# Altium PCB PCB.PcbDoc
Units mm, origin at the board's own origin, x right, y up, seen from the top; angles counter-clockwise.
Board outline 79.8 x 60 mm, 2 copper layers (Top Layer, Bottom Layer); 37 components, 34 nets, 177 pads, 36 vias.
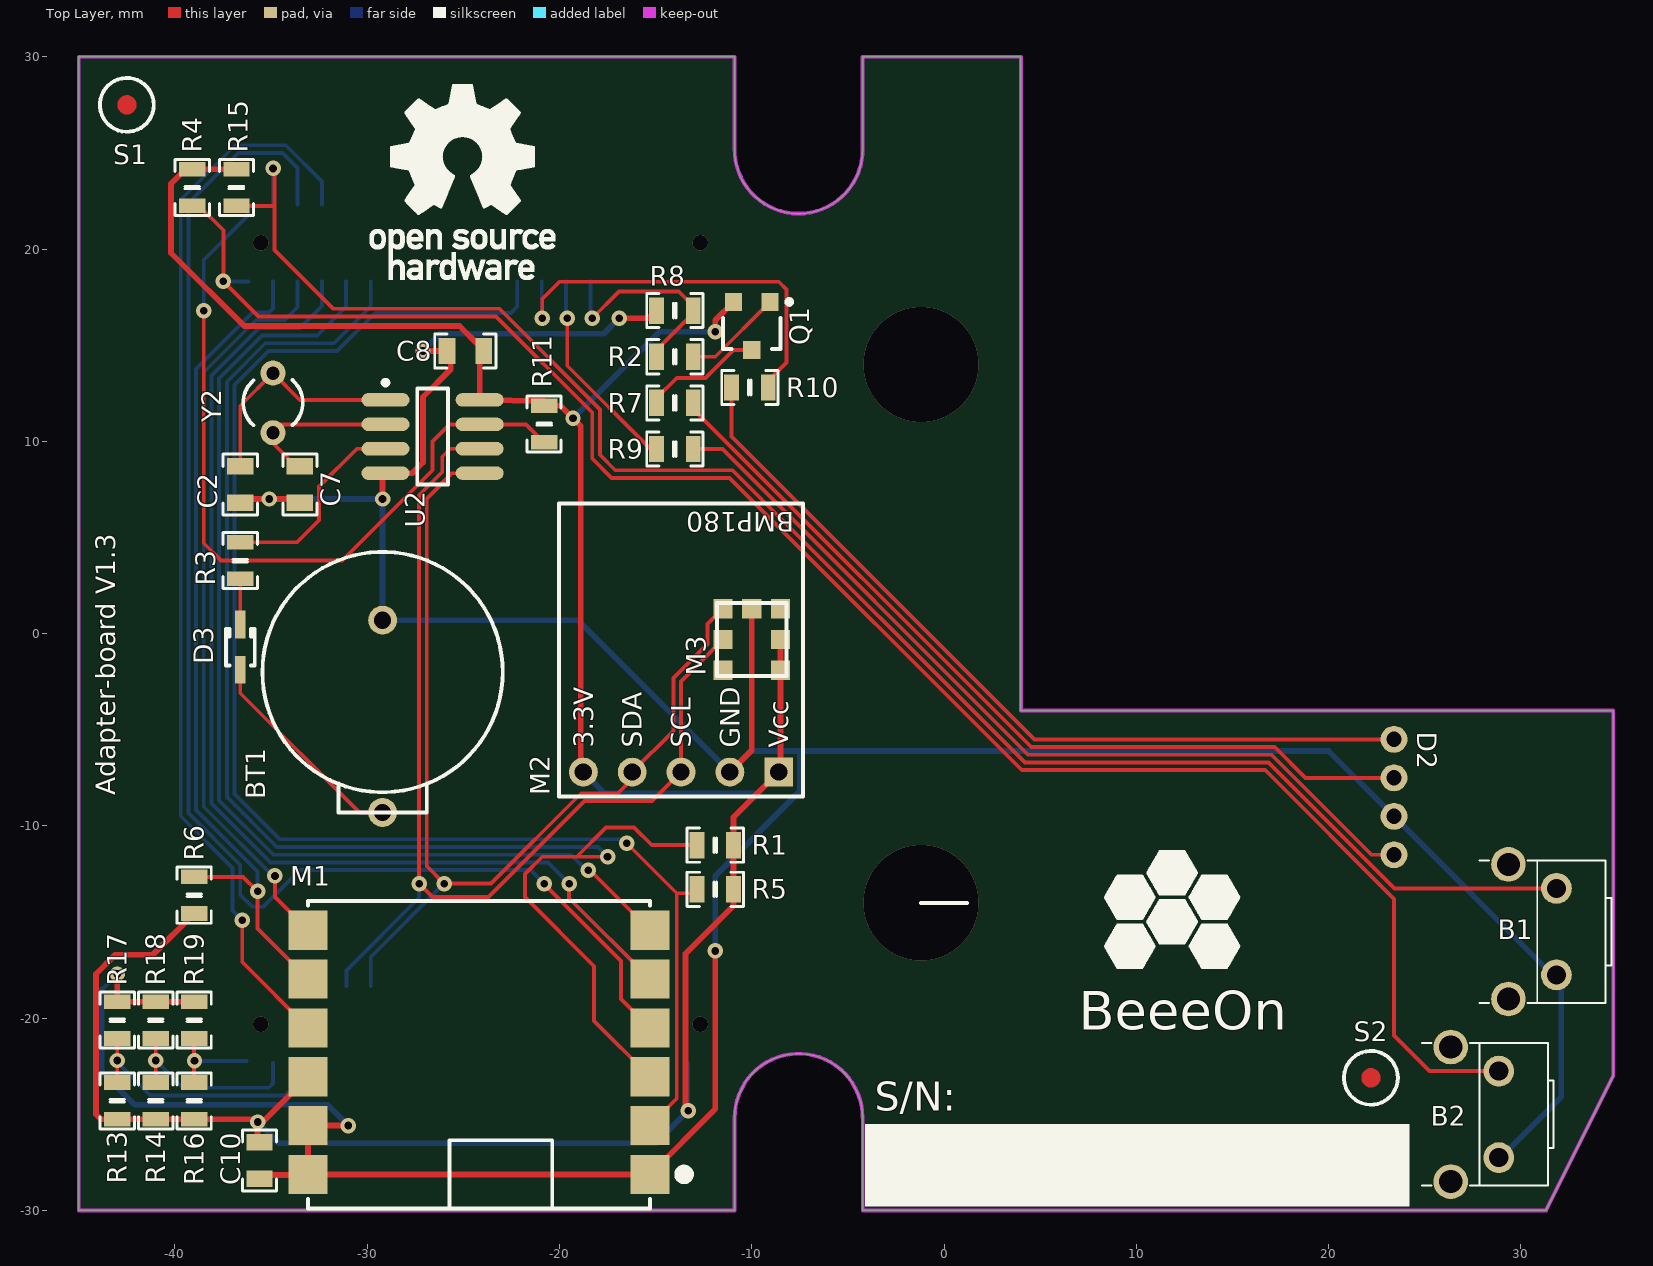
[diagram p0: Top Layer view]
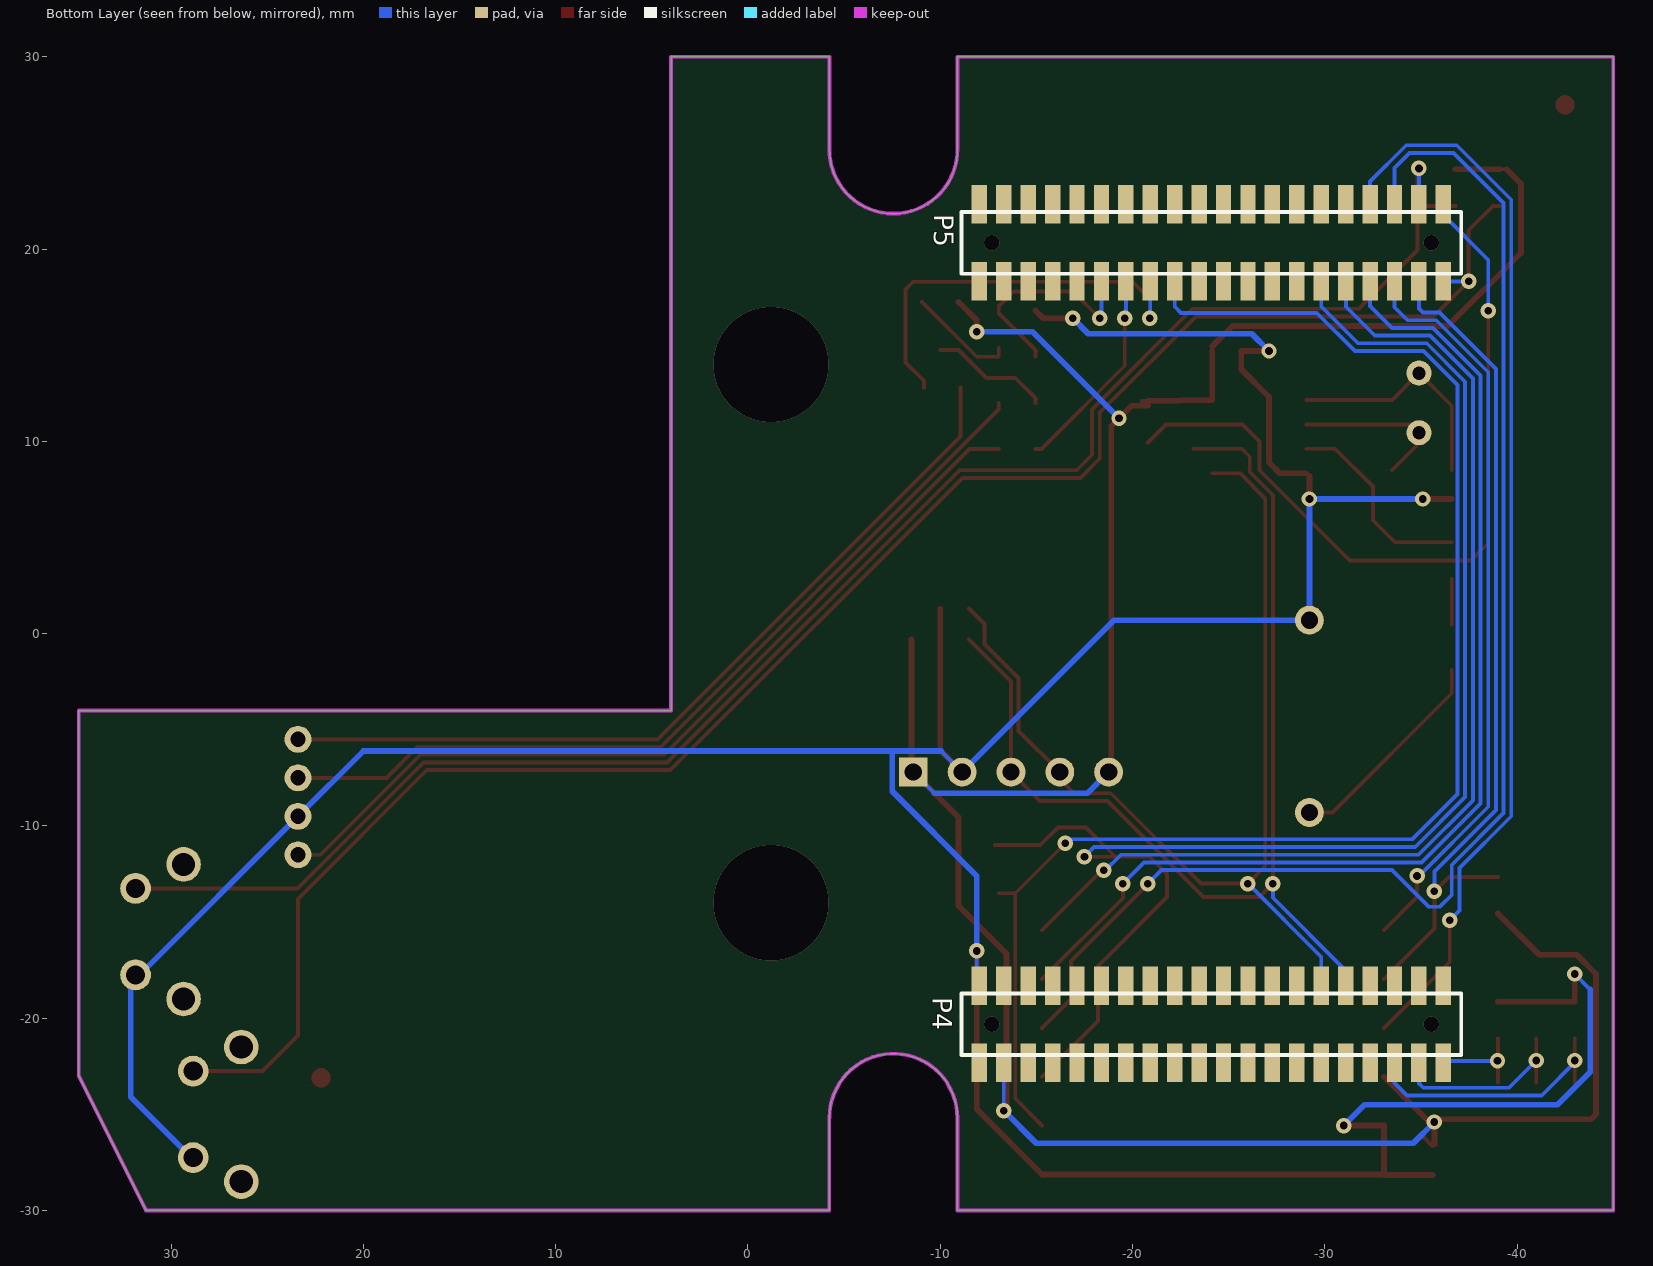
[diagram p1: Bottom Layer view, seen from below]

## Layer stack, top to bottom
Top Layer: signal copper 0.0356
Dielectric: dielectric 0.32, FR-4, Dk 4.8
Bottom Layer: signal copper 0.0356

## Board outline
-45,-30 -45,30 -10.892,30 -10.892,25.222 ccw(c-7.565,25.171) -4.237,25.222 -4.237,30 4,30 4,-4 34.8,-4 34.8,-23 31.3,-30 -4.225,-30 -4.225,-25.171 -4.237,-25.171 ccw(c-7.565,-25.171) -10.892,-25.197 -10.892,-30

## Design rules (kind name [scope] priority, off if disabled: settings)
Clearance Clearance_1 [OnLayer('Mechanical 1') vs inPolygon] p1: gap=0.5
Clearance [All] p2: gap=0.2
HoleSize [All] p1: absolutevalues=TRUE maxlimit=10 minlimit=0.025 maxpercent=80.000 minpercent=20.000
MinimumSolderMaskSliver [All] p1: minsoldermaskwidth=0.2
PolygonConnect [All] p1: connectstyle=Direct reliefconductorwidth=0.254 reliefentries=4 polygonreliefangle="90 Angle"
RoomDefinition connect [InComponentClass('connect')] p1 off: confinementstyle=ConfineIn formatcopy=TRUE lockcomponents=FALSE outline 60.8,-17.4 72.9,-17.4 72.9,-12.6 60.8,-12.6
RoutingVias [All] p1: holewidth=0.4 width=0.8 viastyle="Through Hole" minholewidth=0.4 minwidth=0.8 maxholewidth=10 maxwidth=10
SilkToSilkClearance [All] p1: silktosilkclearance=0.1
SilkscreenOverComponentPads [All] p1: minsilkscreentomaskgap=0.1
SolderMaskExpansion [All] p1: expansion=0.102
Width [All] p1: maxlimit=2.54 minlimit=0.2 preferedwidth=0.2
24 further rules are at their usual default settings.

## Components (designator, comment, footprint, x,y, rotation, side; value= is the part's Value field where it differs from the comment)
B1 "BUTTON" SPST_BTN 32,-15.5 r90 top locked
B2 "BUTTON" SPST_BTN 29,-25 r90 top
BT1 "Battery" BATT1220-HORIZONTAL -29.2,-2 r270 top
C2 "10pF" C0805 -36.6,7.75 r90 top
C7 "10pF" C0805 -33.5,7.75 r90 top
C8 "100nF" C0805 -24.9,14.7 r0 top
C10 "100nF" C0805 -35.6,-27.4 r90 top
D2 "LED MULTI3 CC" "LED_MULTI - AXIAL" 23.4,-8.5 r0 top locked
D3 "BAT46" SOD-323 -36.6,-0.7 r90 top
M1 "MRF89XAM8A" MRF89XAM8A -15.3,-13.9 r180 top locked
M2 "BMP180 Module" BMP180_MODULE -8.6,-7.2 r270 top locked
M3 "BMP180" BMP180 -10,-0.2 r90 top
P4 "GPIO-1" HDR127-20-F -24.1,-20.32 r180 bottom locked
P5 "GPIO-2" HDR127-20-F -24.1,20.32 r180 bottom locked
Q1 "PNP_BC857" SOT23 -10,16 r180 top
R1 "10k" R0805 -11.9,-11 r0 top
R2 "10k" R0805 -14,14.4 r0 top
R3 "1k" R0805 -36.6,3.8 r270 top
R4 "10k" R0805 -39.1,23.2 r90 top
R5 "10k" R0805 -11.9,-13.3 r0 top
R6 "10k" R0805 -39,-13.6 r270 top
R7 "150" R0805 -14,12 r0 top
R8 "10k" R0805 -14,16.8 r0 top
R9 "22" R0805 -14,9.6 r0 top
R10 "22" R0805 -10.1,12.8 r0 top
R11 "10k" R0805 -20.8,10.9 r270 top
R13 "10k" R0805 -43,-24.3 r90 top
R14 "10k" R0805 -41,-24.3 r90 top
R15 "10k" R0805 -36.8,23.2 r90 top
R16 "10k" R0805 -39,-24.3 r90 top
R17 "10k" R0805 -43,-20.1 r90 top
R18 "10k" R0805 -41,-20.1 r90 top
R19 "10k" R0805 -39,-20.1 r90 top
S1 "TARGET" TARGET -42.5,27.5 r0 top
S2 "TARGET" TARGET 22.2,-23.1 r0 top
U2 "MCP79410" SO8_M -26.6,10.25 r0 top
Y2 "32.768KHz" R38 -34.9,12 r180 top

## Footprints (in the part's own frame and the unit in brackets; to place one, negate y for a bottom-side part, rotate by r counter-clockwise, add the part's x,y. Pads: shape width x height; smd on the part's side, far side on the other; paste and mask are expansions set on the pad)
BATT1220-HORIZONTAL [mm]
  round 1.5 hole 0.9: 1(7.3,0) 2(-2.7,0)
  silkscreen extent -6.25,-6.25 7.3,6.25, body extent -6.2,-6.24 7.3,6.24, height 2.65
BMP180 [mm] "7Pin LGA package with metal lid. Its dimensions are  3.60mm (±0.1 mm) x   3.80mm (±0.1 mm) x 0.93mm (±0.07 mm)."
  rect 1x1 smd: 1(1.5,-1.5) 2(-0.1,-1.5) 3(-1.7,-1.5) 4(-1.7,1.5) 5(-0.1,1.5) 6(1.5,1.5) 7(1.5,0)
  silkscreen extent -2,-1.8 1.8,1.8, body extent -2,-1.8 1.8,1.8, height 1.5
BMP180_MODULE [mm] "Connector; Header; 5 Position"
  rect 1.5x1.5 hole 0.9: 1(0,0)
  round 1.5 hole 0.9: 2(0,-2.54) 3(0,-5.08) 4(0,-7.62) 5(0,-10.16)
  silkscreen extent -13.97,-11.43 1.27,1.27, body extent -13.97,-11.43 1.27,1.27, height 4
C0805 [mil] "Capacitor SMD 0805; 2.0 x 1.2 mm"
  rect 34x54 smd: 1(-37.5,0) 2(37.5,0)
  silkscreen extent -62,-35 62,35, body extent -39,-24 43,24, height 69
HDR127-20-F [mm] "header female pith 1.27"
  rect 0.8x2 smd: 1(-12.065,-2) 2(-12.065,2) 3(-10.795,-2) 4(-10.795,2) 5(-9.525,-2) 6(-9.525,2) 7(-8.255,-2) 8(-8.255,2) 9(-6.985,-2) 10(-6.985,2) 11(-5.715,-2) 12(-5.715,2) 13(-4.445,-2) 14(-4.445,2) 15(-3.175,-2) 16(-3.175,2) 17(-1.905,-2) 18(-1.905,2) 19(-0.635,-2) 20(-0.635,2) 21(0.635,-2) 22(0.635,2) 23(1.905,-2) 24(1.905,2) 25(3.175,-2) 26(3.175,2) 27(4.445,-2) 28(4.445,2) 29(5.715,-2) 30(5.715,2) 31(6.985,-2) 32(6.985,2) 33(8.255,-2) 34(8.255,2) 35(9.525,-2) 36(9.525,2) 37(10.795,-2) 38(10.795,2) 39(12.065,-2) 40(12.065,2)
  silkscreen extent -13,-1.6 13,1.6
"LED_MULTI - AXIAL" [mm] "LED 5mm axial"
  round 1.4 hole 0.8: 1(0,3) 2(0,1) 3(0,-1) 4(0,-3)
  body extent 2.5,-1.9 3.5,3.9, height 0.2
MRF89XAM8A [mil] "868MHz Ultra-Low Power  Sub-GHz Transceiver Module"
  rect 80x80 smd: 1(0,560) 2(0,460) 3(0,360) 4(0,260) 5(0,160) 6(0,60) 7(700,60) 8(700,160) 9(700,260) 10(700,360) 11(700,460) 12(700,560)
  silkscreen extent -80,0 700,630, body extent 0,0 700,1100, height 5
R38 [mm] "Crystal, Thru-Hole; 2 Leads; Body 3.1 x 8.2 mm (Dia.xH)"
  round 1.3 hole 0.7: 1(0,1.55) 2(0,-1.55)
  silkscreen extent -1.55,-1.19 1.55,1.17
R0805 [mil] "Resistor SMD 0805; 2.0 x 1.2 mm"
  rect 30x54 smd: 1(-37.5,0) 2(37.5,0)
  silkscreen extent -58,-35 58,35, body extent -39,-24 43,24, height 69
SO8_M [mm] "SOIC, 8-Leads, Body 4.9x3.9mm, Pitch 1.27mm, IPC Low Density"
  oval 2.5x0.7 smd: 1(-2.45,1.905) 2(-2.45,0.635) 3(-2.45,-0.635) 4(-2.45,-1.905) 5(2.45,-1.905) 6(2.45,-0.635) 7(2.45,0.635) 8(2.45,1.905)
  silkscreen extent -2.57,-2.5 0.8,2.93, body extent -2,-2.5 2,2.5, height 1.75
SOD-323 [mm] "SOD-323/SC-76; 2 Leads; Body 1.7 x 1.3 mm, (LxW)"
  rect 1.45x0.55 smd: 1(1.175,0) 2(-1.175,0)
  silkscreen extent -0.95,-0.75 0.95,0.75, body extent -0.85,-0.65 0.85,0.65, height 0.9
SOT23 [mm] "SOT23; 3 Leads; Body 3.0 x 1.3 mm"
  rect 0.9x0.95 smd: 1(-0.95,-1.25) 2(0.95,-1.25) 3(0,1.25)
  silkscreen extent -2.08,-1.37 1.5,1.2, body extent -1.5,-0.7 1.5,0.7, height 1.75
SPST_BTN [mm] "SWITCH, right angle"
  round 1.8 hole 1.2: 0(-3.5,2.65) 0(3.5,2.65)
  round 1.6 hole 1: 1(-2.25,0.15) 2(2.25,0.15)
  silkscreen extent -3.7,-2.7 3.7,4.15, body extent -3.7,-2.3 3.7,1.2, height 8
TARGET [mm]
  Top Layer circle w0.6: c0,0 r0.2
  silkscreen extent -1.4,-1.4 1.4,1.4

## Part data
B1 B2: library part SW-PB_1, "Switch Button KSS341G"
BT1: "Multicell Battery"
C2 C7 C8 C10: library part Cap, "Capacitor"
D2: "COMMON CATHODE, HSMF-A211-A00J1 - LED, SMD, RED/YEL-GRN"
D3: library part Diode, "Default Diode"
M1: "868 MHz Ultra-Low Power  Sub-GHz Transceiver Module"
M2: library part BMP180_MODULE, "Digital Barometric Pressure Sensor Module"
M3: "Digital pressure sensor"
P4 P5: library part "HDR127 20X2", "Header, 40-Pin, pitch 1.27mm"
Q1: "PNP Bipolar Transistor"
R1 R2 R3 R4 R5 R6 R7 R8 R9 R10 R11 R13 R14 R15 R16 R17 R18 R19: library part Res2, "Resistor"
U2: "Microchip i2c RTC real time clock"
Y2: library part XTAL, "Crystal Oscillator"

## Via types
v1: diameter 0.8, hole 0.4, Top Layer to Bottom Layer, tented both sides, 30 vias
v2: diameter 0.8, hole 0.8, Top Layer to Bottom Layer, tented both sides, 4 vias
v3: diameter 6, hole 6, Top Layer to Bottom Layer, 2 vias

## Nets (pads, with @x,y where several pads share a name; then routed paths per layer and width w, separated by ;. In a path a pad name is that pad's centre, name@x,y a point inside that pad or via, vN(x,y) a via of type N, cw(c..) or ccw(c..) an arc to the next point about the centre after c; other vN are vias at no path point)
3.3V: C8.2 C10.2 M1.10 M2.1 M2.5 M3.2 M3.3 P4.3 Q1.2 R1.2 R4.2 R5.2 R6.2 R11.1 R13.1 R14.1 R15.2 R16.1 U2.8 | length 154.8
  Top Layer w0.2: R4.2@-39.448,24.152 R4.2 ; v1@-35.848,-25.252 v1(-35.7,-25.4) v1@-35.436,-25.4 ; C10.2@-35.7,-26.55 -35.6,-26.65 C10.2@-35.1,-26.15 ; C8.2@-24.15,14.7 C8.2@-24.15,14.95 ; R11.1@-20.796,12.104 R11.1@-20.5,12.1
  Top Layer w0.3: R4.2@-39.448,24.152 -40.2,23.4 -40.2,19.8 -36.4,16 -25.2,16 C8.2@-24.15,14.95 ; R4.2 R15.2 ; R6.2 -41.147,-16.7 -43.1,-16.7 -44.1,-17.7 -44.1,-25 -43.847,-25.252 R13.1 R14.1 R16.1 v1@-35.848,-25.252 ; C10.2@-35.7,-26.55 v1(-35.7,-25.4) ; v1@-35.436,-25.4 M1.10 ; C8.2@-24.15,14.7 U2.8 R11.1@-20.796,12.104 ; R11.1 -19.948,11.852 v1(-19.295,11.2) -18.9,10.805 -18.9,-6.94 M2.5@-18.7,-7.14 ; v1(-13.305,-24.805) -13.45,-24.66 -13.45,-16.65 -10.947,-14.147 R5.2 R1.2 -10.947,-9.548 M2.1 ; v1(-11.9,15.7) -11.9,16.3 Q1.2 ; M2.1@-8.5,-7.1 M3.3 M3.2
  Bottom Layer w0.2: v1(-13.305,-24.805) P4.3 ; -9.7,-8.3 M2.1
  Bottom Layer w0.3: v1(-35.7,-25.4) -34.6,-26.5 -15,-26.5 v1(-13.305,-24.805) ; v1(-19.295,11.2) -14.795,15.7 v1(-11.9,15.7) ; M2.5 -17.66,-8.3 -9.7,-8.3
5V: P4.1
BTN1: B1.2 P5.38 R15.1 | length 89.9
  Top Layer w0.2: R15.1 -34.877,22.247 ; v1(-34.895,24.195) -34.83,24.13 -34.83,19.95 -31.78,16.9 -23.134,16.9 -17.9,11.666 -17.9,9.3 -17.1,8.5 -10.997,8.5 4.203,-6.7 16.869,-6.7 23.419,-13.25 B1.2
  Bottom Layer w0.2: P5.38 v1(-34.895,24.195)
BTN2: B2.2 P5.39 R4.1 | length 95
  Top Layer w0.2: R4.1 -38.747,22.247 -37.48,20.98 v1(-37.48,18.32) -35.66,16.5 -23.3,16.5 -18.3,11.5 -18.3,9.1 -17.3,8.1 -11.163,8.1 4.037,-7.1 16.703,-7.1 23.4,-13.797 23.4,-20.9 25.25,-22.75 B2.2
  Bottom Layer w0.2: v1(-37.48,18.32) P5.39
EINT30: M1.4 P5.36 | length 73.1
  Top Layer w0.2: v1@-20.9,-13 -20.83,-13 -16.8,-17.03 -16.8,-19.004 M1.4
  Bottom Layer w0.2: P5.36 -33.625,24.225 -34.4,25 -36.7,25 -39.3,22.4 -39.3,-9.331 -36.6,-12.031 -36.6,-13.6 -36,-14.2 -35.4,-14.2 -33.5,-12.3 -21.5,-12.3 v1(-20.8,-13)
EINT31: M1.9 P5.34 | length 56.3
  Top Layer w0.2: v1(-36.5,-14.9) -36.5,-17.084 M1.9
  Bottom Layer w0.2: v1(-36.5,-14.9) -37,-14.4 -37,-12.197 -39.7,-9.497 -39.7,22.566 -36.866,25.4 -34.234,25.4 -32.355,23.521 P5.34
GND: B1.1 B2.1 BT1.2 C2.1 C7.1 C8.1 C10.1 D2.3 M1.1 M1.11 M1.12 M2.2 M3.7 P4.2 R8.1 R17.2 R18.2 R19.2 U2.4 | length 206.2
  Top Layer w0.2: U2.4@-29.2,8.195 U2.4
  Top Layer w0.3: v1(-43,-17.7) R17.2 R18.2 R19.2 ; C2.1@-36.6,7 v1(-35.1,7) C7.1@-33.5,7 ; C10.1@-35.6,-28.15 M1.12@-33.106,-28.15 ; v1(-30.984,-25.584) M1.11 M1.12 M1.1 -11.9,-24.724 v1(-11.9,-16.5) ; v1(-29.2,7) U2.4@-29.2,8.195 ; U2.4@-29,8.345 -27.655,8.345 -27.1,8.9 -27.1,12.3 -25.65,13.75 -25.65,14.7 v1(-27.1,14.7) ; v1(-16.9,16.4) -15.352,16.4 R8.1 ; M2.2 -10,-6.06 M3.7
  Bottom Layer w0.2: -43.8,-18.5 v1(-43,-17.7) ; v1@-35.23,7.13 v1(-35.1,7) ; P4.2@-11.9,-18.185 v1(-11.9,-16.5) ; M2.2 -10.04,-6.1 ; B1.1@31.45,-17.75 B1.1@32.1,-18.4
  Bottom Layer w0.3: -43.8,-18.5 -43.8,-22.8 -42.1,-24.5 -32.068,-24.5 v1(-30.984,-25.584) ; v1(-35.1,7) v1(-29.2,7) BT1.2 -19.04,0.7 M2.2 ; v1(-27.1,14.7) -26.2,15.6 -17.7,15.6 v1(-16.9,16.4) ; v1(-11.9,-16.5) -11.9,-12.6 -7.5,-8.2 -7.5,-6.1 ; -10.04,-6.1 -7.5,-6.1 ; B2.1@28.9,-27.3 32.1,-24.1 B1.1@32.1,-18.4 ; B1.1@31.75,-17.85 D2.3 20,-6.1 -7.5,-6.1
LED_BLUE: P5.15 R10.2 | length 21.6
  Top Layer w0.2: v1(-20.9,16.4) -20.9,17.4 -20,18.3 -8.6,18.3 -8.2,17.9 -8.2,14.1 -9.148,13.153 R10.2
  Bottom Layer w0.2: v1@-20.925,16.425 P5.15
LED_GREEN: P5.13 R9.1 | length 10.9
  Top Layer w0.2: v1(-19.6,16.4) -19.6,13.931 -15.269,9.6 R9.1
  Bottom Layer w0.2: v1@-19.655,16.355 P5.13
LED_RED: P5.11 R2.1 R8.2 | length 11.4
  Top Layer w0.2: v1(-18.3,16.4) -16.9,17.8 -13.8,17.8 -13.047,17.047 R8.2 ; R2.1 -14.952,14.747 R8.2@-13.047,16.652
  Bottom Layer w0.2: v1@-18.385,16.385 P5.11
MFP: P5.40 R11.2 U2.7 | length 40.9
  Top Layer w0.2: v1(-38.5,16.8) -38.5,4.7 -37.6,3.8 -31.3,3.8 -26.6,8.5 -26.6,10 -25.715,10.885 U2.7 -21.738,10.885 R11.2
  Bottom Layer w0.2: v1(-38.5,16.8) -38.5,19.43 -36.165,21.765 P5.40
NetBT1_1: BT1.1 D3.2 | length 11.2
  Top Layer w0.2: D3.2 -36.6,-3.1 -30.4,-9.3 BT1.1
NetC2_2: C2.2 U2.1 Y2.2 | length 12.2
  Top Layer w0.2: C2.2@-36.6,8.5 -36.6,10.9 -36.6,11.85 Y2.2 -33.505,12.155 U2.1
NetC7_2: C7.2 U2.2 Y2.1 | length 8.6
  Top Layer w0.2: C7.2@-33.5,8.5 -34.9,9.9 Y2.1 -34.465,10.885 U2.2
NetD2_1: D2.1 R10.1 | length 43.5
  Top Layer w0.2: R10.1 -11.053,10.252 4.7,-5.5 D2.1
NetD2_2: D2.2 R7.2 | length 44.7
  Top Layer w0.2: R7.2 -13.048,11.682 4.534,-5.9 17.2,-5.9 18.8,-7.5 D2.2
NetD2_4: D2.4 R9.2 | length 45.2
  Top Layer w0.2: R9.2 -11.531,9.6 4.369,-6.3 17.034,-6.3 22.234,-11.5 D2.4
NetD3_2: D3.1 R3.2 | length 2.4
  Top Layer w0.2: D3.1 R3.2
NetP4_35: P4.35 R13.2 R17.1 | length 13.8
  Top Layer w0.2: R13.2 v1(-43,-22.2) R17.1
  Bottom Layer w0.2: v1@-43.1,-22.2 -41.28,-24.02 -34.27,-24.02 -33.625,-23.375 P4.35
NetP4_37: P4.37 R14.2 R18.1 | length 10.2
  Top Layer w0.2: R14.2 v1(-41,-22.2) R18.1
  Bottom Layer w0.2: v1(-41,-22.2) -39.58,-23.62 -35.12,-23.62 -34.895,-23.395 P4.37
NetP4_39: P4.39 R16.2 R19.1 | length 5
  Top Layer w0.2: R16.2 v1@-39,-22.2 ; R19.1 v1@-39,-22.2 ; v1(-38.98,-22.22) v1@-39,-22.2
  Bottom Layer w0.2: v1(-38.98,-22.22) P4.39@-36.265,-22.22
NetQ1_1: Q1.1 R2.2 | length 5.6
  Top Layer w0.2: R2.2@-13.047,14.853 R2.2 -11.9,14.4 Q1.1
NetQ1_3: Q1.3 R7.1 | length 6.2
  Top Layer w0.2: R7.1 -14.953,12.247 -13.9,13.3 -12.4,13.3 -10.95,14.75 Q1.3
NetR3_1: R3.1 U2.3 | length 10.6
  Top Layer w0.2: R3.1 -33.647,4.753 -32.5,5.9 -32.5,7.65 -30.535,9.615 U2.3
RESET: M1.2 P5.17 R5.1 | length 77.6
  Top Layer w0.2: v1(-16.5,-10.9) -13.9,-13.5 ; M1.2 -13.9,-24.184 -13.9,-13.5 ; R5.1@-13.053,-13.5 -13.9,-13.5
  Bottom Layer w0.2: P5.17 -22.195,17.005 -22.518,16.682 -29.582,16.682 -31.564,14.7 -35.134,14.7 -36.9,12.934 -36.9,-8.334 -34.537,-10.697 -16.603,-10.697 v1@-16.5,-10.8
SPI0_CLK: M1.6 P5.31 | length 56.6
  Top Layer w0.2: v1(-18.5,-12.3) -18.424,-12.3 M1.6
  Bottom Layer w0.2: P5.31 -31.1,18.305 -31.1,17 -32.6,15.5 -35.466,15.5 -37.7,13.266 -37.7,-8.669 -34.869,-11.5 -19.4,-11.5 v1@-18.55,-12.35
SPI0_CS0: M1.3 P5.29 R1.1 | length 78.3
  Top Layer w0.2: -19.1,-11.6 -17.583,-10.083 -16.117,-10.083 -15.2,-11 R1.1 ; v1(-17.5,-11.6) -20.9,-11.6 -21.8,-12.5 -21.8,-13.7 -18.2,-17.3 -18.2,-20.144 M1.3
  Bottom Layer w0.2: P5.29 -29.815,17.015 -31.73,15.1 -35.3,15.1 -37.3,13.1 -37.3,-8.5 -34.703,-11.097 -18.003,-11.097 v1(-17.5,-11.6)
SPI0_CS1: M1.8 P5.37 R6.1 | length 44.5
  Top Layer w0.2: R6.1 -36.453,-12.648 v1(-35.7,-13.4) -35.7,-15.344 M1.8
  Bottom Layer w0.2: v1(-35.7,-13.4) -35.7,-12.366 -38.9,-9.166 -38.9,13.763 -35.963,16.7 -35.1,16.7 -34.895,16.905 P5.37
SPI0_MISO: M1.7 P5.35 | length 38.9
  Top Layer w0.2: v1(-34.8,-12.6) -34.8,-13.704 M1.7
  Bottom Layer w0.2: v1@-34.85,-12.65 -38.5,-9 -38.5,13.597 -35.797,16.3 -34.3,16.3 -33.625,16.975 P5.35
SPI0_MOSI: M1.5 P5.33 | length 57.8
  Top Layer w0.2: v1(-19.5,-13) -19.5,-13.764 M1.5
  Bottom Layer w0.2: P5.33 -32.355,17.045 -33.5,15.9 -35.631,15.9 -38.1,13.431 -38.1,-8.834 -35.034,-11.9 -20.6,-11.9 v1(-19.5,-13)
TWI2_SCK: M2.3 M3.5 P4.32 U2.6 | length 57.1
  Top Layer w0.2: U2.6@-23.17,9.615 U2.6 -25.685,9.615 -26.1,9.2 -26.1,8.4 -27.3,7.2 v1(-27.3,-13) -26.6,-13.7 -23.7,-13.7 -18.7,-8.7 -15.18,-8.7 M2.3 -13.68,-2.48 M3.5
  Bottom Layer w0.2: P4.32 -31.085,-17.519 -27.3,-13.734 v1(-27.3,-13)
TWI2_SDA: M2.4 M3.6 P4.30 U2.5 | length 53.4
  Top Layer w0.2: U2.5 -25.589,8.345 -26.9,7.034 -26.9,-12.1 v1(-26,-13) -23.566,-13 -18.866,-8.3 -16.966,-8.3 -16.22,-7.554 M2.4 -14.08,-5.06 -14.08,-2.314 -12.3,-0.534 -12.3,0.5 M3.6
  Bottom Layer w0.2: P4.30 -29.815,-16.815 v1(-26,-13)
UART3_RX: P4.19
UART3_TX: P4.17
pads on no net: B1.0 B2.0 M3.1 M3.4 P4.4 P4.5 P4.6 P4.7 P4.8 P4.9 P4.10 P4.11 P4.12 P4.13 P4.14 P4.15 P4.16 P4.18 P4.20 P4.21 P4.22 P4.23 P4.24 P4.25 P4.26 P4.27 P4.28 P4.29 P4.31 P4.33 P4.34 P4.36 P4.38 P4.40 P5.1 P5.2 P5.3 P5.4 P5.5 P5.6 P5.7 P5.8 P5.9 P5.10 P5.12 P5.14 P5.16 P5.18 P5.19 P5.20 P5.21 P5.22 P5.23 P5.24 P5.25 P5.26 P5.27 P5.28 P5.30 P5.32
copper on no net:
  other v2: -35.53,-20.32 -12.67,-20.32 -35.53,20.32 -12.67,20.32
  other v3: -1.2,-14 -1.2,14

## Keep-outs
Keep-Out Layer:
  the board outline again, w0.2

## Silkscreen, mask and mechanical layers (free items; w line width, h text height)
Top Overlay:
  drawing of 4109 lines, arcs and shapes, not listed
  text "Adapter-board V1.3" at -43.1,-8.4 h1 r90
  text "BeeeOn" at 7,-20.6 h2
  text "S/N:" at -3.6,-24.8 h1.5
Mechanical 1:
  lines w0.1: -4.237,-25.171 ccw(c-7.565,-25.171) -10.892,-25.197 -10.892,-30 -45,-30 -45,30 -10.892,30 -10.892,25.222 ccw(c-7.565,25.171) -4.237,25.222 -4.237,30 4,30 4,-4 34.8,-4 34.8,-23 31.3,-30 -4.225,-30 -4.225,-25.171
Mechanical 13:
  circle w0.2: c-89.4,-25.6 r2
  circle w0.2: c-79.9,-25.6 r1
  circle w0.2: c-71.9,-25.6 r2
  lines w0.1: -94.4,-29.9 -94.4,-28.7 -66,-28.7

## Dimensions
31.3,-30 to 32.55,-15.5 on Mechanical 13
31.3,-30 to 29.55,-25 on Mechanical 13
4,30 to 34.8,-4 on Mechanical 13
-45,-30 to 34.8,-23 on Mechanical 13
-94.4,-28.7 to -89.4,-26.7 on Mechanical 13
-94.4,-28.7 to -79.9,-26.8 on Mechanical 13
-94.4,-28.7 to -71.9,-26.6 on Mechanical 13
-87.4,-25.6 to -94.4,-28.7 on Mechanical 13
-71.9,-25.6 to -65.6,-30.1 on Mechanical 13
-79.9,-25.6 to -71.5,-34.2 on Mechanical 13
-89.4,-25.6 to -77.6,-35.9 on Mechanical 13
-45,30 to -45,-30 on Mechanical 13
-45,30 to 4,30 on Mechanical 13
-45,30 to -10.892,30 on Mechanical 13
-10.892,30 to -4.237,30 on Mechanical 13
-4.237,30 to -10.892,25.222 on Mechanical 13
-7.565,25.171 to -3.554,21.161 on Mechanical 13

## Text inside footprints (layer, text, board x,y; h text height)
M2: Top Overlay "BMP180" at -7.8,6.3 h1 r180; Top Overlay "Vcc" at -8.092,-5.93 h1 r90; Top Overlay "GND" at -10.632,-5.93 h1 r90; Top Overlay "SCL" at -13.172,-5.93 h1 r90; Top Overlay "SDA" at -15.712,-5.93 h1 r90; Top Overlay "3.3V" at -18.252,-5.93 h1 r90